# Altium PCB УШЯИ 758723.276vwithNOSMD.PcbDoc
Units mm, origin at the board's own origin, x right, y up, seen from the top; angles counter-clockwise.
Board outline 220 x 50 mm, 2 copper layers (Top Layer, Top, Bottom Layer, Bottom); 60 components, 36 nets, 191 pads, 16 vias.
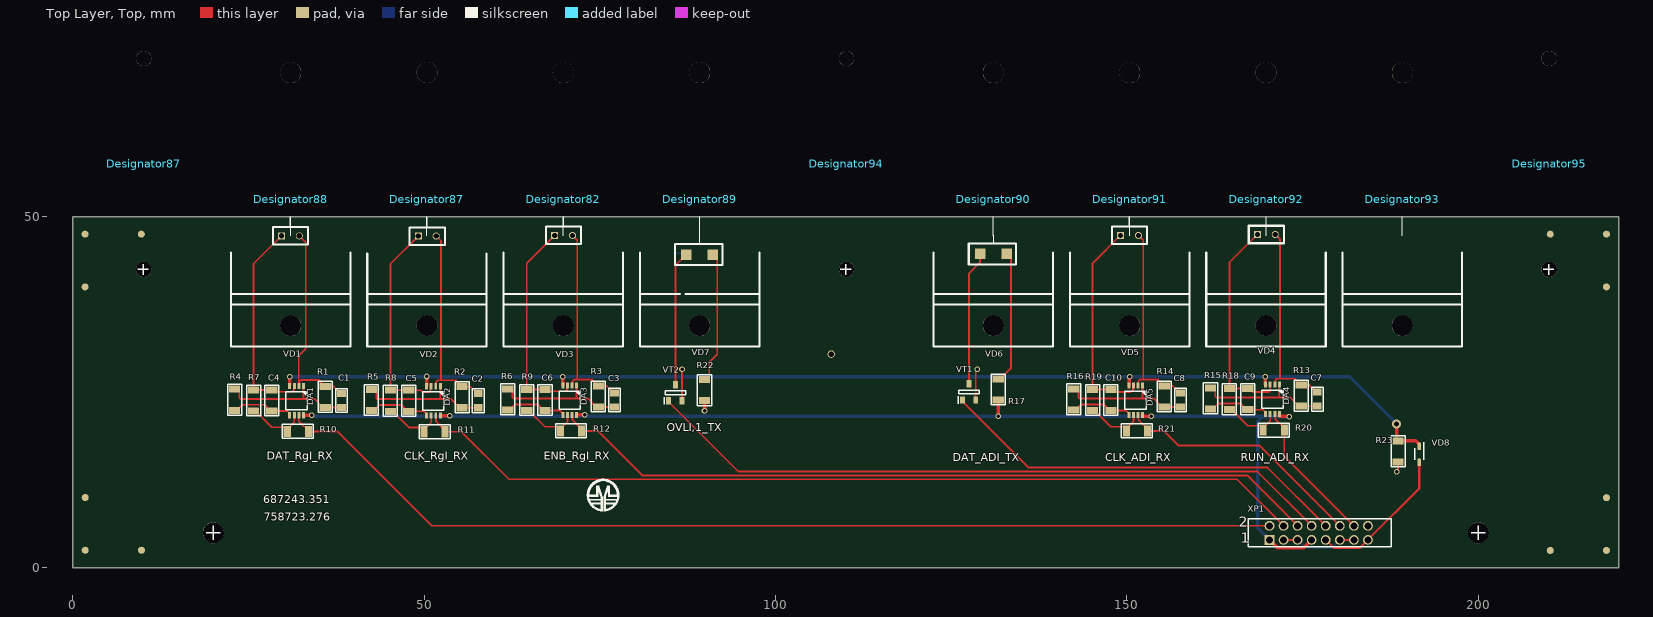
[diagram p0: Top Layer, Top view]
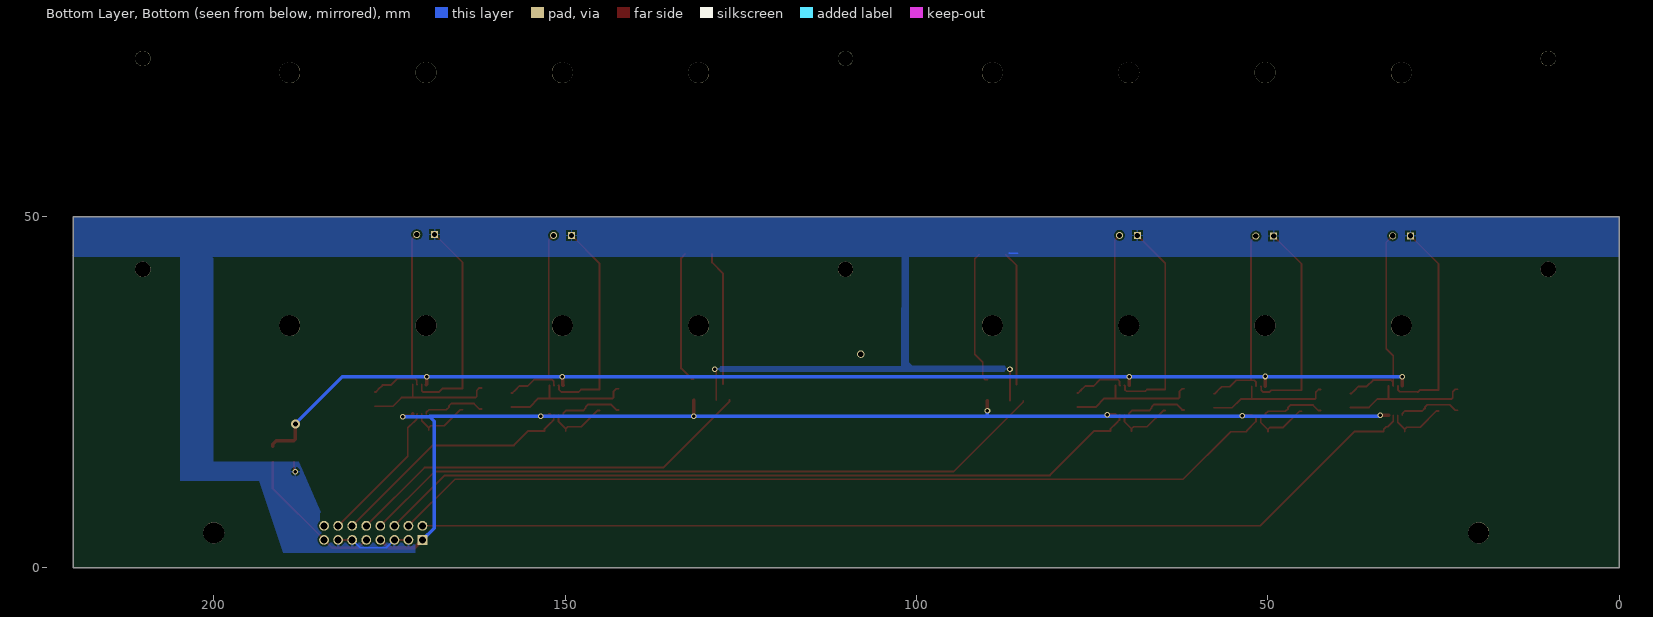
[diagram p1: Bottom Layer, Bottom view, seen from below]

## Layer stack, top to bottom
Top Solder, Top Mask: solder mask 0.0102, Solder Resist, Dk 3.5
Top Layer, Top: signal copper 0.0356
Dielectric 1: dielectric 0.32, FR-4, Dk 4.8
Bottom Layer, Bottom: signal copper 0.0356
Bottom Solder, Bot Mask: solder mask 0.0102, Solder Resist, Dk 3.5

## Board outline
0,0 0,50 220,50 220,0

## Design rules (kind name [scope] priority, off if disabled: settings)
Clearance [All] p1: gap=0.254 ignorepadtopadclearanceinfootprint=FALSE except(0.3: Arc-Arc Arc-Track Arc-THPad Arc-Via Track-Track Track-THPad Track-Via THPad-THPad THPad-Via Via-Via)
PlaneClearance [All] p1: clearance=0.254
PolygonConnect [All] p1: connectstyle=Relief reliefconductorwidth=0.254 reliefentries=4 polygonreliefangle="90 Angle" airgapwidth=0.254
RoutingVias [All] p1: holewidth=0.5 width=0.8 viastyle="Through Hole" minholewidth=0.5 minwidth=0.8 maxholewidth=0.5 maxwidth=2
SolderMaskExpansion [All] p1: expansion=0.102 istentingtop=FALSE
SupplyNets "Schematic Supply Nets" [InNet('-3.3V')] p1: voltage=0.000
SupplyNets "Schematic Supply Nets_1" [InNet('+5.2V')] p2: voltage=0.000
SupplyNets "Schematic Supply Nets_2" [InNet('GND')] p3: voltage=0.000
Width [All] p1: maxlimit=0.254 minlimit=0.254 preferedwidth=0.254
29 further rules are at their usual default settings.

## Classes and differential pairs
component class Main: C1 C2 C3 C4 C5 C6 C7 C8 C9 C10 DA1 DA2 DA3 DA4 DA5 R1 R2 R3 R4 R5 R6 R7 R8 R9 R10 R11 R12 R13 R14 R15 R16 R17 R18 R19 R20 R21 R22 R23 VD1 VD2 VD3 VD4 VD5 VD6 VD7 VD8 VT1 VT2 XP1

## Components (designator, comment, footprint, x,y, rotation, side; value= is the part's Value field where it differs from the comment)
C1 "0805-NP0-50 В-2,4 пФ-1%" "CAP: 0805" 38.223,23.837 r270 top value="2,1 мкФ"
C2 "0805-NP0-50 В-2,4 пФ-1%" "CAP: 0805" 57.7,23.8 r270 top value="2,1 мкФ"
C3 "0805-NP0-50 В-2,4 пФ-1%" "CAP: 0805" 77.1,23.9 r270 top value="2,1 мкФ"
C4 "1206-С0G-50 B-56 пФ+-1%" "CAP: 1206" 28.323,23.837 r270 top value="56 пФ"
C5 "1206-С0G-50 B-56 пФ+-1%" "CAP: 1206" 47.8,23.8 r270 top value="56 пФ"
C6 "1206-С0G-50 B-56 пФ+-1%" "CAP: 1206" 67.2,23.9 r270 top value="56 пФ"
C7 "0805-NP0-50 В-2,4 пФ-1%" "CAP: 0805" 177.1,24.026 r270 top value="2,1 мкФ"
C8 "0805-NP0-50 В-2,4 пФ-1%" "CAP: 0805" 157.626,23.9 r270 top value="2,1 мкФ"
C9 "1206-С0G-50 B-56 пФ+-1%" "CAP: 1206" 167.2,24.026 r270 top value="56 пФ"
C10 "1206-С0G-50 B-56 пФ+-1%" "CAP: 1206" 147.726,23.9 r270 top value="56 пФ"
DA1 "ADA4807-2ARMZ" 8-MSOP 32.823,25.912 r180 top
DA2 "ADA4807-2ARMZ" 8-MSOP 52.3,25.875 r180 top
DA3 "ADA4807-2ARMZ" 8-MSOP 71.7,25.975 r180 top
DA4 "ADA4807-2ARMZ" 8-MSOP 171.7,26.101 r180 top
DA5 "ADA4807-2ARMZ" 8-MSOP 152.226,25.975 r180 top
Designator82 "Comment" Каретка 78.3,31.5 r90 top
Designator87 "Comment" "Планка УШЯИ.735312.010" 20.102,36.5 r90 top locked
Designator87 "Comment" Каретка 58.9,31.5 r90 top
Designator88 "Comment" Каретка 39.5,31.5 r90 top
Designator89 "Comment" Каретка 97.7,31.5 r90 top
Designator90 "Comment" Каретка 139.5,31.5 r90 top
Designator91 "Comment" Каретка 158.9,31.5 r90 top
Designator92 "Comment" Каретка 178.3,31.5 r90 top
Designator93 "Comment" Каретка 197.7,31.5 r90 top
Designator94 "Comment" "Планка УШЯИ.735312.010" 120.102,36.5 r90 top locked
Designator95 "Comment" "Планка УШЯИ.735312.010" 220.102,36.5 r90 top locked
R1 "1206-5,23 кОм+-1%" 1206 35.923,24.337 r270 top value="5,23 кОм"
R2 "1206-5,23 кОм+-1%" 1206 55.4,24.3 r270 top value="5,23 кОм"
R3 "1206-5,23 кОм+-1%" 1206 74.8,24.4 r270 top value="5,23 кОм"
R4 "1206-140 Ом+-1%" 1206 23.023,23.937 r270 top value="140 Ом"
R5 "1206-140 Ом+-1%" 1206 42.5,23.9 r270 top value="140 Ом"
R6 "1206-140 Ом+-1%" 1206 61.9,24 r270 top value="140 Ом"
R7 "1206-102 Ом+-1%" 1206 25.723,23.837 r270 top value="102 Ом"
R8 "1206-102 Ом+-1%" 1206 45.2,23.8 r270 top value="102 Ом"
R9 "1206-102 Ом+-1%" 1206 64.6,23.9 r270 top value="102 Ом"
R10 "1206-215 Ом+-1%" 1206 32.023,19.437 r0 top value="215 Ом"
R11 "1206-215 Ом+-1%" 1206 51.5,19.4 r0 top value="215 Ом"
R12 "1206-215 Ом+-1%" 1206 70.9,19.5 r0 top value="215 Ом"
R13 "1206-5,23 кОм+-1%" 1206 174.8,24.526 r270 top value="5,23 кОм"
R14 "1206-5,23 кОм+-1%" 1206 155.326,24.4 r270 top value="5,23 кОм"
R15 "1206-140 Ом+-1%" 1206 161.9,24.126 r270 top value="140 Ом"
R16 "1206-140 Ом+-1%" 1206 142.426,24 r270 top value="140 Ом"
R17 "1206-30 Ом+-5%" 1206 131.7,25.4 r270 top value="30 Ом"
R18 "1206-102 Ом+-1%" 1206 164.6,24.026 r270 top value="102 Ом"
R19 "1206-102 Ом+-1%" 1206 145.126,23.9 r270 top value="102 Ом"
R20 "1206-215 Ом+-1%" 1206 170.9,19.626 r0 top value="215 Ом"
R21 "1206-215 Ом+-1%" 1206 151.426,19.5 r0 top value="215 Ом"
R22 "1206-30 Ом+-5%" 1206 89.9,25.3 r270 top value="30 Ом"
R23 "1206-1 кОм+-5%" 1206 188.6,16.6 r90 top value="1 кОм"
VD1 "SFH203" SFH203 30.967,47.263 r0 top
VD2 "SFH203" SFH203 50.444,47.226 r0 top
VD3 "SFH203" SFH203 69.844,47.326 r0 top
VD4 "SFH203" SFH203 169.844,47.452 r0 top
VD5 "SFH203" SFH203 150.37,47.326 r0 top
VD6 "VSMY2853RG" VSMY2853G 131,44.7 r0 top
VD7 "VSMY2853RG" VSMY2853G 89.2,44.6 r0 top
VD8 "BZX384-C4V7" SOD-323 191.6,16.2 r270 top
VT1 "BSS138BK" SOT-23-3 126.6,23.9 r90 top
VT2 "BSS138BK" SOT-23-3 84.8,23.8 r90 top
XP1 "DS1018-02-16B2" DS1018-02-16B2 170.3,6 r0 top

## Footprints (in the part's own frame and the unit in brackets; to place one, negate y for a bottom-side part, rotate by r counter-clockwise, add the part's x,y. Pads: shape width x height; smd on the part's side, far side on the other; paste and mask are expansions set on the pad)
8-MSOP [mm] "pitch 0.65 mm"
  rect 0.42x0.89 smd: 1(0,0) 2(0.65,0) 3(1.3,0) 4(1.95,0) 5(1.95,4.19) 6(1.3,4.19) 7(0.65,4.19) 8(0,4.19)
  round 0.5 on Mech1: 6(-0.1,0.1)
  round 0.5 on Top Overlay: ""(-0.7,0)
  silkscreen extent -0.53,0.8 2.5,3.4, body extent -0.53,-0.35 2.48,4.55, height 1.15
1206 [mm] "Resistor SMD"
  rect 1x1.6 smd: 1(-1.5,0) 2(1.5,0)
  silkscreen extent -2.2,-1 2.2,1, body extent -1.65,-0.8 1.55,0.8, height 0.47
"CAP: 0805" [mm]
  rect 1x1.25 smd: 1(-1,0) 2(1,0)
  silkscreen extent -1.7,-0.82 1.7,0.82, body extent -1,-0.62 1,0.63, height 0.78
"CAP: 1206" [mm]
  rect 1x1.6 smd: 1(-1.5,0) 2(1.5,0)
  silkscreen extent -2.2,-1 2.2,1, body extent -1.6,-0.8 1.6,0.8, height 1
DS1018-02-16B2 [mm]
  rect 1.4x1.4 hole 1: 1(0,-2)
  round 1.4 hole 1: 2(0,0) 3(2,-2) 4(2,0) 5(4,-2) 6(4,0) 7(6,-2) 8(6,0) 9(8,-2) 10(8,0) 11(10,-2) 12(10,0) 13(12,-2) 14(12,0) 15(14,-2) 16(14,0)
  silkscreen extent -3,-3 17.3,1, body extent -3,-3 17.2,1, height 5
SFH203 [mm]
  rect 1x1 hole 0.75 unplated: 1(-1.27,0)
  round 1 hole 0.75 unplated: 2(1.27,0)
  silkscreen extent -2.5,-1.25 2.5,2.69
SOD-323 [mm]
  rect 1.085x0.55 smd: 1(-1.14,0) 2(1.14,0)
  silkscreen extent -1.68,-0.64 0.83,0.64, body extent -1.25,-0.64 1.25,0.64, height 1.17
SOT-23-3 [mm]
  rect 1.05x0.7 smd: 1(0,0) 2(0,-1.9) 3(2.3,-0.95)
  silkscreen extent -0.53,-2.41 1.43,0.6, body extent -0.05,-2.41 2.35,0.51, height 1.2
VSMY2853G [mm]
  rect 1.5x1.5 smd: 1(1.901,0) 2(-1.895,0)
  silkscreen extent -3.5,-1.5 3.25,2.65, body extent -1.9,-1.17 1.9,1.38, height 2.25
Каретка [mm]
  round 3 hole 3: ""(3,8.5) ""(39,8.5)
  silkscreen extent 0,0 13.35,17
"Планка УШЯИ.735312.010" [mm] "Планка УШЯИ.735312.010"
  round 2.2 hole 2.2 unplated: 0(6,10) 0(36,10)
  body extent 0,0 42,20, height 3

## Part data
DA1 DA2 DA3 DA4 DA5: "3.1 nV/√Hz, 1 mA, 180 MHz, / Rail-to-Rail Input/Output Amplifiers"
VD1 VD2 VD3 VD4 VD5: "Silicon PIN Photodiode"
VD6 VD7: "High Speed Infrared Emitting Diodes, 850 nm, / Surface Emitter Technology"
VT1 VT2: "60 V, 360 mA N-channel Trench MOSFET"
XP1: "pitch 2mm, 20 pin 2x10"
R1 R2 R3 R4 R5 R6 R7 R8 R9 R10 R11 R12 R13 R14 R15 R16 R17 R18 R19 R20 R21 R22 R23: ModelPrint=1206

## Free pads (board coordinates)
  round 3 hole 3 unplated: 0(20,5) 0(200,5)
  round 1.05 hole 0.8 unplated: 2(107.929,30.429)
  round 1 smd mask+0.5: R1(1.75,40) R1(1.75,47.502) R1(1.772,2.524) R1(1.772,10.026) R1(9.75,47.502) R1(9.772,2.524) R1(210.25,2.498) R1(210.25,47.502) R1(218.25,2.498) R1(218.25,10) R1(218.25,40) R1(218.25,47.502)

## Via types
v1: diameter 0.8, hole 0.5, Top Layer, Top to Bottom Layer, Bottom, 15 vias
v2: diameter 1.27, hole 0.711, Top Layer, Top to Bottom Layer, Bottom, 1 vias

## Nets (pads, with @x,y where several pads share a name; then routed paths per layer and width w, separated by ;. In a path a pad name is that pad's centre, name@x,y a point inside that pad or via, vN(x,y) a via of type N, cw(c..) or ccw(c..) an arc to the next point about the centre after c; other vN are vias at no path point)
+5.2V: DA1.8 DA2.8 DA3.8 DA4.8 DA5.8 R17.2 R22.2 XP1.1 XP1.7 | length 176
  Top Layer, Top w0.5: DA1.8 v1(34.023,21.722) ; DA2.8 v1(53.646,21.685) ; DA3.8 v1(72.841,21.785) ; v1(89.9,22.4) R22.2 ; v1(131.7,21.6) R17.2 ; DA5.8 152.226,21.683 152.309,21.6 v1(153.467,21.6) ; XP1.1 171.427,2.873 175.173,2.873 XP1.7 ; DA4.8 171.7,21.676 171.783,21.593 173.014,21.593 v1(173.1,21.507)
  Bottom Layer, Bottom w0.5: v1@34,21.6 v1@53.731,21.6 ; v1(53.646,21.685) v1@53.731,21.6 ; v1(72.841,21.785) v1@72.9,21.726 ; v1(89.9,22.4) 89.9,21.6 ; 169.266,21.6 v1(153.467,21.6) v1(131.7,21.6) 89.9,21.6 ; XP1.1 168.633,5.667 168.633,20.874 169.266,21.507 v1(173.1,21.507) ; v1@53.731,21.6 89.9,21.6
-3.3V: DA1.4 DA2.4 DA3.4 DA4.4 DA5.4 R23.2 VD8.1 | length 173
  Top Layer, Top w0.5: DA1.4 30.886,25.926 30.886,27.186 v1(30.9,27.2) ; DA2.4 v1(50.35,27.25) ; v1(69.712,27.2) 69.731,27.181 69.731,25.994 DA3.4 ; DA5.4 150.335,26.034 150.335,27.135 v1(150.4,27.2) ; v1(169.678,27.2) 169.714,27.164 169.714,26.137 DA4.4 ; v2(188.4,20.5) 188.4,18.3 R23.2 191.108,18.1 191.6,17.608 VD8.1
  Bottom Layer, Bottom w0.5: v1(30.9,27.2) v1@50.3,27.2 ; v1(50.35,27.25) v1@50.3,27.2 ; v1(69.712,27.2) v1@69.75,27.2 ; v2(188.4,20.5) 181.7,27.2 v1(169.678,27.2) v1(150.4,27.2) ; v1@50.3,27.2 v1@69.75,27.2 ; v1@69.75,27.2 v1@150.1,27.2 ; v1@150.1,27.2 v1(150.4,27.2) ; v1@150.1,27.2 v1(150.4,27.2)
-8V: VD8.2 XP1.9 XP1.15 | length 21
  Top Layer, Top w0.3: XP1.9 179.427,2.873 183.173,2.873 XP1.15 191.6,11.3 VD8.2
CLK_ADI: DA5.7 R21.2 XP1.12 | length 35.8
  Top Layer, Top w0.254: DA5.7 151.635,21.726 151.635,21.065 152.081,20.619 152.107,20.619 152.926,19.8 R21.2 155.226,19.5 157.286,17.44 168.86,17.44 XP1.12
CLK_RgI: DA2.7 R11.2 XP1.4 | length 127.5
  Top Layer, Top w0.254: DA2.7 51.688,21.647 51.688,20.859 R11.2@53,19.547 ; R11.2 55.3,19.4 62.076,12.624 165.676,12.624 XP1.4
DAT_ADI: VT1.1 XP1.10 | length 59.2
  Top Layer, Top w0.254: VT1.1 126.6,23.725 136.039,14.286 170.014,14.286 XP1.10
DAT_RgI: DA1.7 R10.2 XP1.2 | length 145.4
  Top Layer, Top w0.254: DA1.7 32.173,20.896 32.959,20.11 33.15,20.11 33.523,19.737 R10.2 37.654,19.437 51.092,6 170.243,6 170.3,5.943 XP1.2
ENb_RgI: DA3.7 R12.2 XP1.6 | length 110.4
  Top Layer, Top w0.254: DA3.7 71.109,21.726 71.109,21.065 71.555,20.619 71.581,20.619 72.4,19.8 R12.2 74.7,19.5 81.022,13.178 167.122,13.178 XP1.6
GND: C4.1 C5.1 C6.1 C9.1 C10.1 DA1.3 DA2.3 DA3.3 DA4.3 DA5.3 R7.1 R8.1 R9.1 R18.1 R19.1 R23.1 VD1.1 VD2.1 VD3.1 VD4.1 VD5.1 VT1.2 VT2.2 XP1.3 XP1.5 XP1.11 XP1.13 | length 174.2
  Top Layer, Top w0.254: 25.723,28.285 25.723,28.403 ; VD1.1 25.723,43.289 25.723,28.403 ; DA1.3 31.464,25.853 31.464,25.309 31.241,25.086 28.746,25.086 28.66,25 C4.1 R7.1 25.723,28.403 ; VD2.1 45.2,43.252 R8.1 C5.1 49.5,25.3 49.751,25.049 50.718,25.049 50.941,25.272 50.941,25.816 DA2.3 ; VD3.1 64.6,43.352 R9.1 C6.1 67.451,25.149 70.118,25.149 70.341,25.372 70.341,25.916 DA3.3 ; VT2.2 v1(86.7,28.3) ; VT1.2@128.5,24.075 VT1.2 128.5,28.1 v1(128.7,28.3) ; VD5.1 145.126,43.352 R19.1 C10.1 148.099,25.027 150.522,25.027 150.867,25.372 150.867,25.916 DA5.3 ; VD4.1 164.6,43.478 R18.1 167.5,25.526 168,25.026 170.19,25.026 170.4,25.236 DA4.3 ; XP1.3 XP1.5 ; XP1.11 XP1.13 ; v1(188.4,13.7) 188.4,13.848 188.6,14.048 R23.1
  Bottom Layer, Bottom w0.254: 85.6,44.8 86.8,44.8 86.812,44.812 ; XP1.5 175.427,2.873 179.173,2.873 XP1.11
NetC1_1: C1.1 DA1.2 R1.1 VD1.2 | length 29.6
  Top Layer, Top w0.254: VD1.2 33.148,46.352 33.148,31.171 32.173,30.196 DA1.2 32.232,25.971 32.232,26.515 32.455,26.738 35.022,26.738 R1.1 37.104,25.837 37.725,25.216 37.725,25.21 38.098,24.837 C1.1
NetC1_2: C1.2 DA1.1 R1.2 R4.1 | length 18.6
  Top Layer, Top w0.254: R4.1 23.323,25.437 23.696,25.064 23.696,24.213 23.845,24.064 32.823,24.064 ; DA1.1 32.823,24.064 ; C1.2 R1.2 35.623,22.837 34.396,24.064 32.823,24.064
NetC2_1: C2.1 DA2.2 R2.1 VD2.2 | length 28.3
  Top Layer, Top w0.254: DA2.2 51.709,25.934 51.709,26.478 51.932,26.701 52.401,26.701 ; VD2.2 52.401,46.539 52.401,26.701 ; C2.1 57.575,24.8 57.202,25.173 57.202,25.179 56.581,25.8 R2.1 54.499,26.701 52.401,26.701
NetC2_2: C2.2 DA2.1 R2.2 R5.1 | length 18.6
  Top Layer, Top w0.254: R5.1 42.8,25.4 43.173,25.027 43.173,24.176 43.322,24.027 52.3,24.027 ; DA2.1 52.3,24.027 ; C2.2 R2.2 55.1,22.8 53.873,24.027 52.3,24.027
NetC3_1: C3.1 DA3.2 R3.1 VD3.2 | length 28.3
  Top Layer, Top w0.254: DA3.2 71.109,26.034 71.109,26.578 71.332,26.801 71.801,26.801 ; VD3.2 71.801,46.639 71.801,26.801 ; C3.1 76.975,24.9 76.602,25.273 76.602,25.279 75.981,25.9 R3.1 73.899,26.801 71.801,26.801
NetC3_2: C3.2 DA3.1 R3.2 R6.1 | length 18.6
  Top Layer, Top w0.254: R6.1 62.2,25.5 62.573,25.127 62.573,24.276 62.722,24.127 71.7,24.127 ; DA3.1 71.7,24.127 ; C3.2 R3.2 74.5,22.9 73.273,24.127 71.7,24.127
NetC4_2: C4.2 DA1.5 R4.2 | length 9
  Top Layer, Top w0.254: R4.2 23.323,22.437 24.104,23.218 27.324,23.218 27.65,22.893 27.65,22.71 28.023,22.337 C4.2 30.493,22.337 30.873,21.957 DA1.5
NetC5_2: C5.2 DA2.5 R5.2 | length 9
  Top Layer, Top w0.254: R5.2 42.8,22.4 43.581,23.181 46.802,23.181 47.127,22.856 47.127,22.673 47.5,22.3 C5.2 49.97,22.3 50.35,21.92 DA2.5
NetC6_2: C6.2 DA3.5 R6.2 | length 9
  Top Layer, Top w0.254: R6.2 62.2,22.5 62.981,23.281 66.202,23.281 66.527,22.956 66.527,22.773 66.9,22.4 C6.2 69.37,22.4 69.75,22.02 DA3.5
NetC7_1: C7.1 DA4.2 R13.1 VD4.2 | length 28.3
  Top Layer, Top w0.254: DA4.2 171.109,26.16 171.109,26.704 171.332,26.927 171.801,26.927 ; VD4.2 171.801,46.765 171.801,26.927 ; C7.1 176.975,25.026 176.602,25.399 176.602,25.405 175.981,26.026 R13.1 173.899,26.927 171.801,26.927
NetC7_2: C7.2 DA4.1 R13.2 R15.1 | length 18.6
  Top Layer, Top w0.254: R15.1 162.2,25.626 162.573,25.253 162.573,24.402 162.722,24.253 171.7,24.253 ; DA4.1 171.7,24.253 ; C7.2 R13.2 174.5,23.026 173.273,24.253 171.7,24.253
NetC8_1: C8.1 DA5.2 R14.1 VD5.2 | length 28.3
  Top Layer, Top w0.254: DA5.2 151.635,26.034 151.635,26.578 151.858,26.801 152.327,26.801 ; VD5.2 152.327,46.639 152.327,26.801 ; C8.1 157.501,24.9 157.128,25.273 157.128,25.279 156.507,25.9 R14.1 154.425,26.801 152.327,26.801
NetC8_2: C8.2 DA5.1 R14.2 R16.1 | length 18.6
  Top Layer, Top w0.254: R16.1 142.726,25.5 143.099,25.127 143.099,24.276 143.248,24.127 152.226,24.127 ; DA5.1 152.226,24.127 ; C8.2 R14.2 155.026,22.9 153.799,24.127 152.226,24.127
NetC9_2: C9.2 DA4.5 R15.2 | length 9
  Top Layer, Top w0.254: R15.2 162.2,22.626 162.981,23.407 166.202,23.407 166.527,23.082 166.527,22.899 166.9,22.526 C9.2 169.37,22.526 169.75,22.146 DA4.5
NetC10_2: C10.2 DA5.5 R16.2 | length 9
  Top Layer, Top w0.254: R16.2 142.726,22.5 143.507,23.281 146.728,23.281 147.053,22.956 147.053,22.773 147.426,22.4 C10.2 149.896,22.4 150.276,22.02 DA5.5
NetDA1_6: DA1.6@31.523,21.722 R7.2 R10.1 | length 8.6
  Top Layer, Top w0.254: R7.2 26.023,22.337 28.323,20.037 30.223,20.037 R10.1@30.523,19.737 ; R10.1 R10.1@30.523,19.737 ; DA1.6@31.523,21.722 31.523,20.737 R10.1@30.523,19.737
NetDA2_6: DA2.6@51,21.685 R8.2 R11.1 | length 8.6
  Top Layer, Top w0.254: R8.2 45.5,22.3 47.8,20 49.7,20 R11.1@50,19.7 ; R11.1 R11.1@50,19.7 ; DA2.6@51,21.685 51,20.7 R11.1@50,19.7
NetDA3_6: DA3.6@70.4,21.785 R9.2 R12.1 | length 8.6
  Top Layer, Top w0.254: R9.2 64.9,22.4 67.2,20.1 69.1,20.1 R12.1@69.4,19.8 ; R12.1 R12.1@69.4,19.8 ; DA3.6@70.4,21.785 70.4,20.8 R12.1@69.4,19.8
NetDA4_6: DA4.6@170.4,21.911 R18.2 R20.1 | length 8.6
  Top Layer, Top w0.254: R18.2 164.9,22.526 167.2,20.226 169.1,20.226 R20.1@169.4,19.926 ; R20.1 R20.1@169.4,19.926 ; DA4.6@170.4,21.911 170.4,20.926 R20.1@169.4,19.926
NetDA5_6: DA5.6@150.926,21.785 R19.2 R21.1 | length 8.6
  Top Layer, Top w0.254: R19.2 145.426,22.4 147.726,20.1 149.626,20.1 R21.1@149.926,19.8 ; R21.1 R21.1@149.926,19.8 ; DA5.6@150.926,21.785 150.926,20.8 R21.1@149.926,19.8
NetR17_1: R17.1 VD6.1 | length 19
  Top Layer, Top w0.254: R17.1 132,26.9 133.5,28.4 133.5,44.101 VD6.1
NetR22_1: R22.1 VD7.1 | length 19
  Top Layer, Top w0.254: R22.1 90.2,26.8 90.573,27.173 90.573,29.273 91.7,30.4 91.7,44.001 VD7.1
NetVD6_2: VD6.2 VT1.3 | length 29.7
  Top Layer, Top w0.254: 127.55,36.788 VT1.3 127.55,41.933 129.105,43.488 VD6.2
NetVD7_2: VD7.2 VT2.3 | length 19.1
  Top Layer, Top w0.254: VT2.3 85.75,43.045 VD7.2
NetXP1_16: XP1.16
OVLI,1: VT2.1 XP1.8 | length 99
  Top Layer, Top w0.254: VT2.1 84.8,23.625 94.693,13.732 168.568,13.732 XP1.8
RUN_ADI: DA4.7 R20.2 XP1.14 | length 20.6
  Top Layer, Top w0.254: DA4.7 171.109,21.852 171.109,21.191 171.555,20.745 171.581,20.745 172.4,19.926 R20.2 172.4,15.9 XP1.14
pads on no net: DA1. DA1.6@32.923,25.812 DA2. DA2.6@52.4,25.775 DA3. DA3.6@71.8,25.875 DA4. DA4.6@171.8,26.001 DA5. DA5.6@152.326,25.875 Designator82. Designator87. Designator87.0 Designator88. Designator89. Designator90. Designator91. Designator92. Designator93. Designator94.0 Designator95.0

## Polygon pours and split planes (outlines as drawn)
GND on Bottom Layer, Bottom "Main_GND" (solid, pour order 2): 102.1,45.5 101.1,45.5 101.1,29.3 100.6,28.8 86.4,28.8 86.4,27.9 129,27.9 129,28.7 102.2,28.7
GND on Bottom Layer, Bottom "Main_GND" (solid, pour order 0): 171.3,5.4 171.4,5.3 184.9,5.3 184.9,7.795 184.795,7.9 187.9,15.1 200.1,15.1 200.1,44.1 200.3,44.3 0,44.3 0,49.993 0.083,50.076 220,50.076 220,44.6 220.3,44.3 204.8,44.3 204.8,12.3 204.7,12.4 193.5,12.4 190.1,2.2 171.3,2.2

## Silkscreen, mask and mechanical layers (free items; w line width, h text height)
Top Overlay, Top Silk:
  drawing of 19 lines, arcs and shapes, not listed
  text "OVLI,1_TX" at 84.5,19.05 h2
  text "DAT_RgI_RX" at 27.6,14.974 h2
  text "CLK_RgI_RX" at 47.2,14.974 h2
  text "ENB_RgI_RX" at 67,14.974 h2
  text "DAT_ADI_TX" at 125.2,14.791 h2
  text "CLK_ADI_RX" at 146.926,14.791 h2
  text "RUN_ADI_RX" at 166.2,14.791 h2
  text "687243.351" at 27.1,8.8 h2
  text "758723.276" at 27.2,6.3 h2
Mechanical 1, Top Assy:
  the board outline again, w0.2
Mechanical 4, Help:
  lines w0.1: 10,41 10,44 ; 15,0 15,10 25,10 25,0 ; 18,5 22,5 ; 20,3 20,7 ; 110,41 110,44 ; 195,0 195,10 205,10 205,0 ; 198,5 202,5 ; 200,3 200,7 ; 210,41 210,44
Mechanical 13:
  lines w0.2: 200,36.5 220,36.5 220,78.5 200,78.5 200,36.5
  lines w0.3: 0,50 220,50 ; 0,65 220,65

## Text inside footprints (layer, text, board x,y; h text height)
XP1: Top Overlay, Top Silk "1" at 166.2,3.1 h2.5; Top Overlay, Top Silk "2" at 165.902,5.4 h2.5